# Altium PCB PCB1.PcbDoc
Units mil, origin at the board's own origin, x right, y up, seen from the top; angles counter-clockwise.
Board outline 2525.6 x 755 mil, 2 copper layers (Top Layer, Bottom Layer); 10 components, 6 nets, 37 pads, 0 vias.
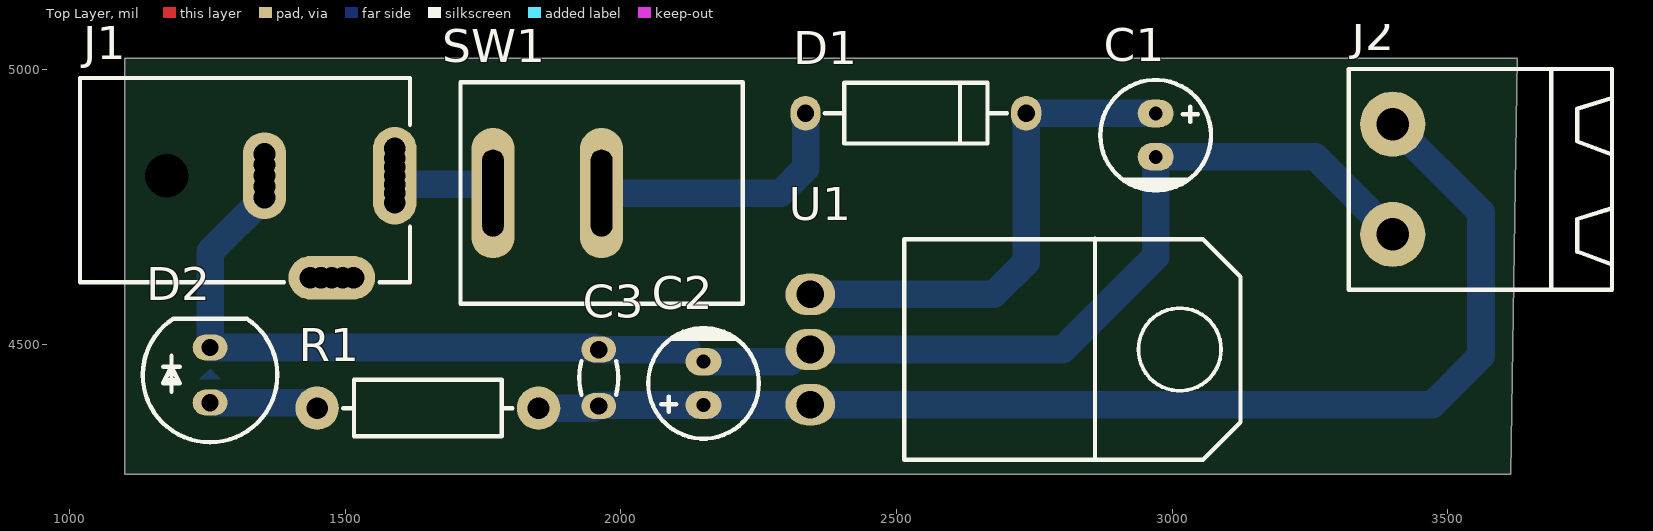
[diagram p0: Top Layer view]
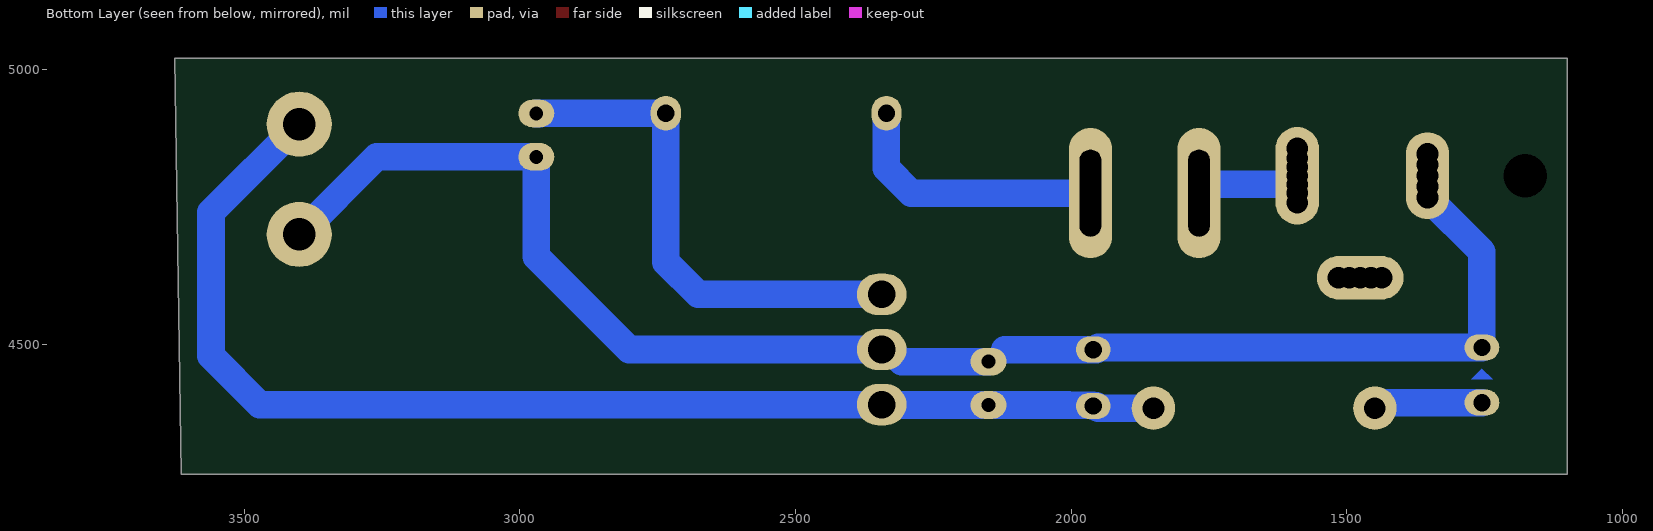
[diagram p1: Bottom Layer view, seen from below]
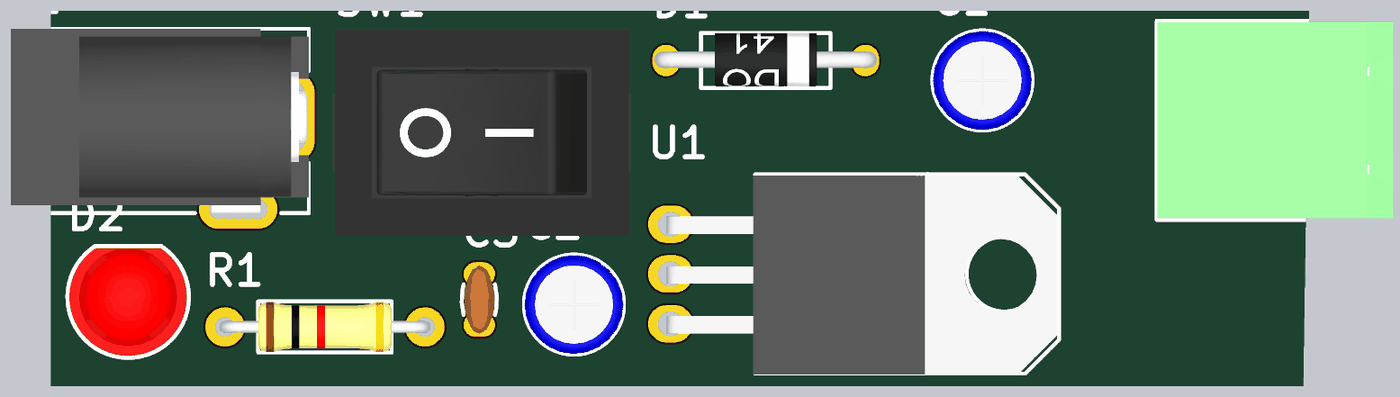
[diagram p2: 3D render of the assembled board from above, using the file's embedded part models]

## Layer stack, top to bottom
Top Solder: solder mask 0.4, Solder Resist, Dk 3.5
Top Layer: signal copper 1.4
Dielectric 1: dielectric 12.6, FR-4, Dk 4.8
Bottom Layer: signal copper 1.4
Bottom Solder: solder mask 0.4, Solder Resist, Dk 3.5

## Board outline
3614.17,4265 3625.6,5020 1100,5020 1100,4265

## Design rules (kind name [scope] priority, off if disabled: settings)
Clearance [All] p1: gap=10 ignorepadtopadclearanceinfootprint=FALSE
PolygonConnect [All] p1: connectstyle=Relief reliefconductorwidth=10 reliefentries=4 polygonreliefangle="90 Angle" airgapwidth=10
RoutingVias [All] p1: holewidth=28 width=50 viastyle="Through Hole" minholewidth=28 minwidth=50 maxholewidth=28 maxwidth=50
SolderMaskExpansion [All] p1: expansion=4 istentingtop=FALSE
Width [All] p1: maxlimit=55 minlimit=45 preferedwidth=50
30 further rules are at their usual default settings.

## Components (designator, comment, footprint, x,y, rotation, side; value= is the part's Value field where it differs from the comment)
C1 "100uF" "cap 01" 2970,4880 r90 top
C2 "100uF" "cap 01" 2150,4430 r270 top
C3 "330nF" C_CERM_D3 1960,4440 r270 top
D1 "1N4007" D_AX04_DO41 2535,4920 r0 top
D2 "LED5MM_RED" LED5MM_RED 1255,4445 r90 top
J1 "Power Jack" "Power Jack" 1019.13,4806.5 r0 top
J2 "CONN_TB2" MSTB_2 3400,4800 r270 top
R1 "220ꭥ" R025W_AX04 1650,4385 r0 top
SW1 "ToggleSwitch" SWRCK_SPST_S_15X10 1965,4775 r0 top
U1 "L7805CDT-TR" "L7805 Right" 2675,4395 r270 top

## Footprints (in the part's own frame and the unit in brackets; to place one, negate y for a bottom-side part, rotate by r counter-clockwise, add the part's x,y. Pads: shape width x height; smd on the part's side, far side on the other; paste and mask are expansions set on the pad)
C_CERM_D3 [mm] "CAP, CER MULTILAYER, D:3.5mm, pitch: 2.54mm"
  oval 1.2x1.6 hole 0.8: 1(-1.3,0) 2(1.3,0)
  silkscreen extent -0.78,-0.9 0.78,0.9, body extent -1.75,-0.75 1.75,0.75, height 4
"cap 01" [mil]
  oval 50x65 hole 25: 1(39.37,0) 2(-39.37,0)
  silkscreen extent -100,-100 100,100, body extent -99,-99 99,99, height 494
D_AX04_DO41 [mm] "DIODE 0.4 INCH SPACING DO-41"
  oval 1.4x1.6 hole 0.8: 1(-5.08,0) 2(5.08,0)
  silkscreen extent -4.2,-1.4 4.2,1.4, body extent -5.68,-1.32 5.68,1.4, height 2.85
"L7805 Right" [mil]
  oval 75x90 hole 50: 1(-196.38,-331.26) 2(-96.38,-331.26) 3(3.62,-331.26)
  silkscreen extent -297,-161 104,449, body extent -294,-339 106,445, height 175
LED5MM_RED [mm] "LED THD 5MM RED"
  oval 1.2x1.6 hole 0.8: 1(-1.27,0) 2(1.27,0)
  Bottom Layer region: -0.2,0.5 -0.2,-0.5 0.3,0
  silkscreen extent -3.1,-3.1 2.6,3.1, body extent -3,-3 2.5,3, height 9.14
MSTB_2 [mm] "PHOENIX MSTB 2, 5-G, 5.08mm pitch, 2pin"
  round 3 hole 1.5: 1(-2.54,0) 2(2.54,0)
  silkscreen extent -5.08,-2.03 5.08,10.1, body extent -5,-2 5,10, height 8.7
"Power Jack" [mm] "Power Adaptor Jack"
  round 1.5 hole 1: 1(14.5,-1.25) 1(14.5,-0.8) 1(14.5,-0.4) 1(14.5,0.4) 1(14.5,0.8) 1(14.5,1.25) 2(8.5,-1) 2(8.5,1) 2(8.5,-0.5) 2(8.5,0.5) 3(10.6,-4.7) 3(11.1,-4.7) 3(12.1,-4.7) 3(12.6,-4.7)
  oval 2x4.5 hole 1: 1(14.5,0)
  oval 2x4 hole 1: 2(8.5,0)
  oval 4x2 hole 1: 3(11.6,-4.7)
  round 1.9 hole 2: MH(4,0)
  silkscreen extent 0,-4.9 15.2,4.5, body extent 0,-4.9 15.2,4.5, height 11
R025W_AX04 [mm] "RESISTOR 1/4 WATT, AXIAL0.4"
  round 2 hole 1: 1(-5.1,0) 2(5.1,0)
  silkscreen extent -3.9,-1.3 3.9,1.3, body extent -5.38,-1.28 5.38,1.28, height 2.6
SWRCK_SPST_S_15X10 [mm] "SWITCH Rocker, SPST, Straight, 15x10"
  oval 2x6 hole 1 slot 4 at 90 deg: 1(-5,0) 2(0,0)
  silkscreen extent -6.5,-5.1 6.5,5.1, body extent -7.6,-5.25 7.6,5.25, height 13.1

## Part data
C1: library part Cap-Polar, "Polar Capacitor", Voltage=50V, Adding Date=1387/12/20, Designer="Saeid Jorablo", Organazation=ControTec
C2: library part Cap-Polar, "Polar Capacitor", Voltage=16V, Adding Date=1387/12/20, Designer="Saeid Jorablo", Organazation=ControTec
C3: library part CAP_THD_CER, "CAP, THD, CER MULTI LAYER,", ASSEMBLY=ASSEMBLY, DESC="CAP, CER MULTI LAYER,", MANF=MANF, MANF_P#=MANF_PART#, PARAM2=50V, PRICE="100= 1$"
D1: library part DIODE_THD_1N4007, "DIODE, GENERAL PURPOSE, 1000V/1A", ASSEMBLY=ASSEMBLY, DESC=DESCRIPTION, MANF=Diodes, MANF_P#=1N4007, PARAM="1000V, 1.15V", PARAM2=1.5A, PRICE=PRICE
D2: library part LED_THD_5MM_RED, "LED, THD, 5MM, RED", ASSEMBLY=ASSEMBLY, DESC=DESCRIPTION, MANF=MANF, MANF_P#=MANF_PART#, PARAM2=2.2V, PRICE=PRICE
J2: library part CONN_MSTB_2, "CONN, PHOENIX MSTB, 5-G, 5.08mm pitch", PARAM=12A, PARAM2=320V
R1: library part RES_THD, "RESISTOR, THD", ASSEMBLY=ASSEMBLY, DESC=DESCRIPTION, DIST#=MOUSER, MANF="KOA SPEER", MANF_P#=RK73H1ETTP4701F, PARAM=0.063W, PARAM2=1%, PRICE="100= 0.5$"
SW1: library part SWROK_SPST_R_15X10, "SWITCH, Rocker, SPST, THD, 15x10.5mm", ASSEMBLY=ASSEMBLY, DESC=DESCRIPTION, MANF=-, MANF_PART#=-, PARAM=-, PRICE=-
J1: Adding Date=10/21/2009, Company=Personal, Designer="Saeid Jorablo", Project Name=Laser

## Nets (pads, with @x,y where several pads share a name; then routed paths per layer and width w, separated by ;. In a path a pad name is that pad's centre, name@x,y a point inside that pad or via, vN(x,y) a via of type N, cw(c..) or ccw(c..) an arc to the next point about the centre after c; other vN are vias at no path point)
+5V: C2.1 C3.2 J2.1 R1.2 U1.3 | length 2234.8
  Bottom Layer w50: R1.2 1951.06,4385 1954.88,4388.82 C3.2 1961.18,4390 2005,4390 2005.63,4390.63 C2.1 2342.99,4390.63 U1.3 3471.38,4391.38 3560,4480 3560,4740 J2.1
GND: C1.2 C2.2 C3.1 D2.2 J1.2 J2.2 U1.2 | length 2787.5
  Bottom Layer w50: J1.2@1353.78,4806.5 1353.78,4767.13 1255,4668.35 D2.2 1951.06,4495 1954.88,4491.18 C3.1 2120.69,4491.18 ; C2.2 2307.47,4469.37 2329.48,4491.38 U1.2 2801.38,4491.38 2970,4660 C1.2 3259.37,4840.63 J2.2
NetC1_1: C1.1 D1.2 U1.1 | length 920.8
  Bottom Layer w50: U1.1 2676.38,4591.38 2735,4650 D1.2 2961.87,4920 2962.5,4919.37 C1.1
NetD1_1: D1.1 SW1.2 | length 488.6
  Bottom Layer w50: SW1.2 2290,4775 2335,4820 D1.1
NetD2_1: D2.1 R1.1 | length 198.4
  Bottom Layer w50: D2.1 1431.44,4395 1441.44,4385 R1.1
NetJ1_1: J1.1 SW1.1 | length 186.1
  Bottom Layer w50: J1.1@1590,4790.75 1754.87,4790.75 1768.15,4777.47 SW1.1
pads on no net: J1.3 J1.MH